# Altium PCB PCB1.PcbDoc
Units mm, origin at the board's own origin, x right, y up, seen from the top; angles counter-clockwise.
Board outline 107.7 x 33.66 mm, 2 copper layers (Top Layer, Bottom Layer); 44 components, 34 nets, 109 pads, 8 vias.
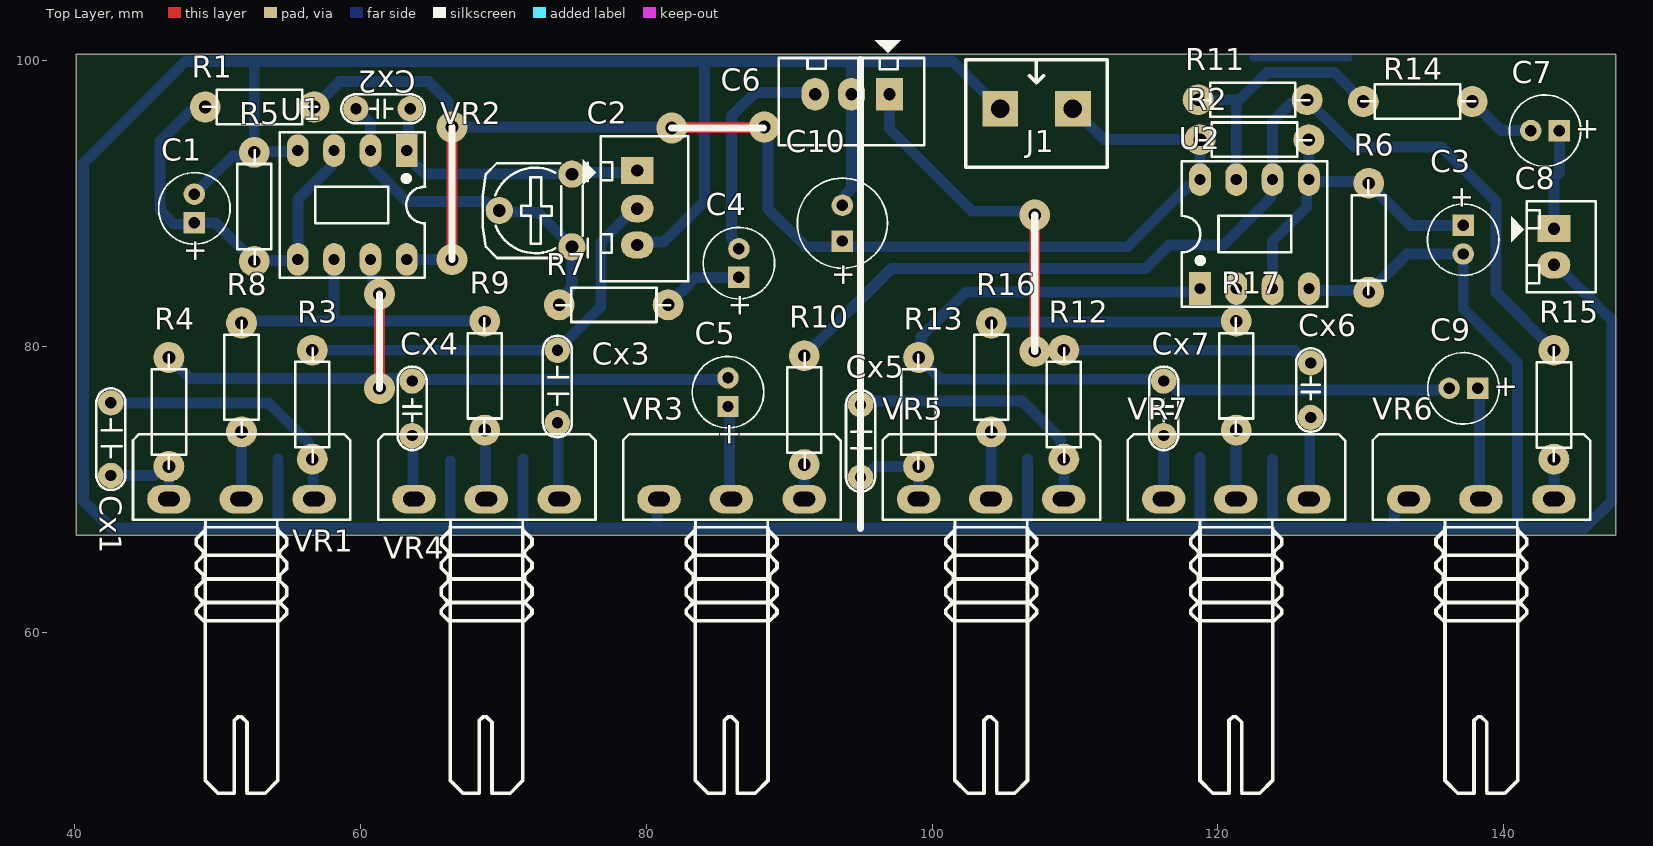
[diagram p0: Top Layer view]
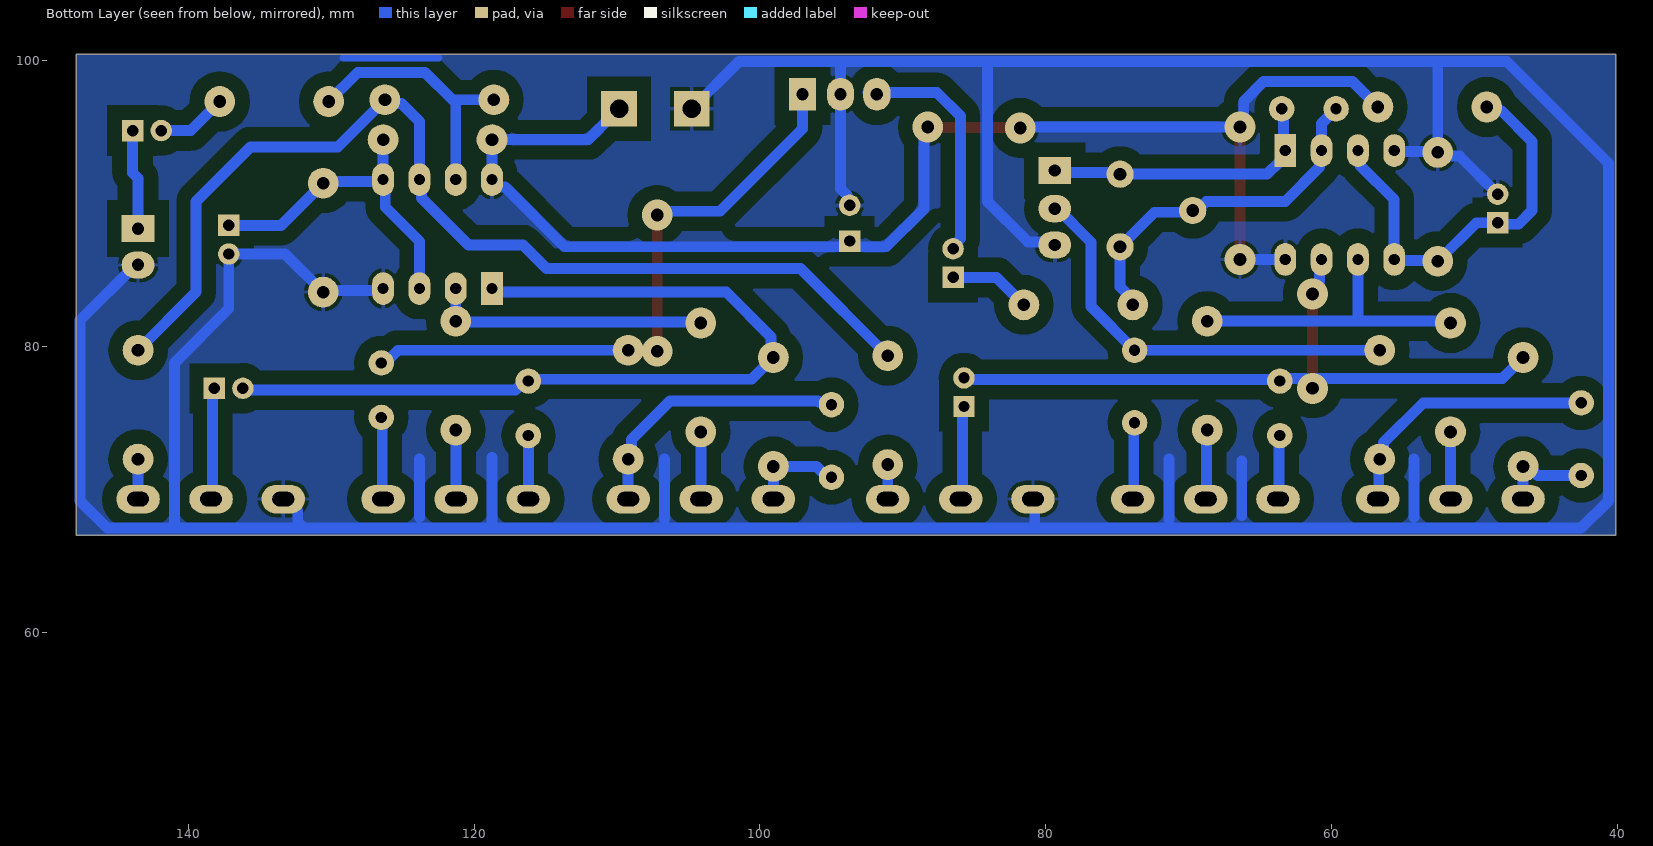
[diagram p1: Bottom Layer view, seen from below]
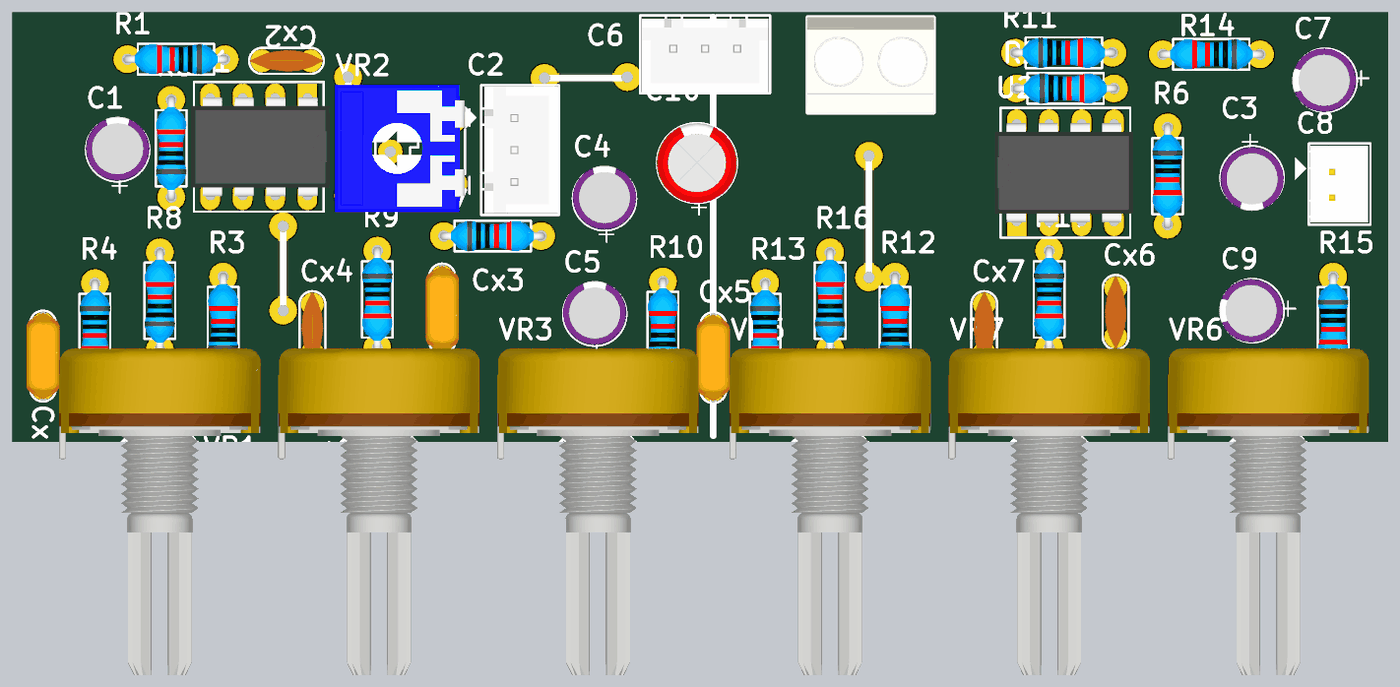
[diagram p2: 3D render of the assembled board from above, using the file's embedded part models]

## Layer stack, top to bottom
Top Solder: solder mask 0.0102, Solder Resist, Dk 3.5
Top Layer: signal copper 0.0356
Dielectric 1: dielectric 0.32, FR-4, Dk 4.8
Bottom Layer: signal copper 0.0356
Bottom Solder: solder mask 0.0102, Solder Resist, Dk 3.5

## Board outline
40.132,66.802 40.132,100.457 147.828,100.457 147.828,66.802

## Design rules (kind name [scope] priority, off if disabled: settings)
Clearance [All] p1: gap=0.254 ignorepadtopadclearanceinfootprint=FALSE except(0: Arc-Hole Track-Hole SMDPad-Hole THPad-Hole Via-Hole Fill-Hole Poly-Hole Region-Hole Text-Hole; 1.016: Arc-Fill Arc-Poly Arc-Region Track-Fill Track-Poly Track-Region SMDPad-Fill SMDPad-Poly SMDPad-Region THPad-Fill THPad-Poly THPad-Region Via-Fill Via-Poly Via-Region Fill-Fill Fill-Poly Fill-Region Poly-Poly Poly-Region Region-Region)
PolygonConnect [All] p1: connectstyle=Relief reliefconductorwidth=0.254 reliefentries=4 polygonreliefangle="90 Angle" airgapwidth=0.254
RoutingVias [All] p1: holewidth=0.711 width=1.27 viastyle="Through Hole" minholewidth=0.711 minwidth=1.27 maxholewidth=0.711 maxwidth=1.27
SolderMaskExpansion [All] p1: expansion=0.102 istentingtop=FALSE
Width [All] p1: maxlimit=1.016 minlimit=0.508 preferedwidth=0.762
30 further rules are at their usual default settings.

## Components (designator, comment, footprint, x,y, rotation, side; value= is the part's Value field where it differs from the comment)
C1 "CN-ALU-DIP" CA-ALU-5 48.387,89.678 r90 top value=104
C2 "EFX" Header3 79.375,92.202 r270 top
C3 "CN-ALU-DIP" CA-ALU-5 137.164,87.487 r270 top value=104
C4 "CN-ALU-DIP" CA-ALU-5 86.487,85.852 r90 top value=104
C5 "CN-ALU-DIP" CA-ALU-5 85.725,76.819 r90 top value=104
C6 "INPUT" Header3 96.901,97.663 r180 top
C7 "CN-ALU-DIP" CA-ALU-5 142.891,95.123 r180 top value=104
C8 "OUTPUT" Header2 143.51,88.265 r270 top
C9 "CN-ALU-DIP" CA-ALU-5 137.176,77.089 r180 top value=104
C10 "CN-ALU-DIP" CA-ALU-6.3R 93.726,88.646 r90 top value=104
Cx1 "XXpF" CN2-O 42.672,73.533 r270 top value=33pF
Cx2 "XXpF" CN1.5 61.468,96.647 r0 top value=33pF
Cx3 "XXpF" CN2-O 73.914,77.216 r270 top value=33pF
Cx4 "XXpF" CN1.5 63.627,75.565 r90 top value=33pF
Cx5 "XXpF" CN2-O 95.123,73.406 r270 top value=33pF
Cx6 "XXpF" CN1.5 126.492,77.089 r270 top value=33pF
Cx7 "XXpF" CN1.5 116.205,75.565 r90 top value=33pF
J1 "KF2" KF2-5.08 107.315,96.647 r0 top
R1 "Res" RES-1/4W-SMALL 53.213,96.774 r180 top
R2 "Res" RES-1/4W-SMALL 122.301,94.488 r0 top
R3 "Res" RES-1/4W-SMALL 56.642,75.692 r90 top
R4 "Res" RES-1/4W-SMALL 46.609,75.692 r270 top
R5 "Res" RES-1/4W-SMALL 52.578,89.535 r90 top
R6 "Res" RES-1/4W-SMALL 130.556,87.884 r270 top
R7 "Res" RES-1/4W-SMALL 77.47,82.931 r0 top
R8 "Res" RES-1/4W-SMALL 51.689,77.597 r90 top
R9 "Res" RES-1/4W-SMALL 68.707,78.232 r270 top
R10 "Res" RES-1/4W-SMALL 91.059,75.311 r90 top
R11 "Res" RES-1/4W-SMALL 122.174,97.282 r0 top
R12 "Res" RES-1/4W-SMALL 109.22,75.692 r90 top
R13 "Res" RES-1/4W-SMALL 99.06,75.692 r270 top
R14 "Res" RES-1/4W-SMALL 134.239,97.155 r180 top
R15 "Res" RES-1/4W-SMALL 143.51,76.2 r270 top
R16 "Res" RES-1/4W-SMALL 104.14,77.597 r90 top
R17 "Res" RES-1/4W-SMALL 121.285,78.232 r270 top
U1 "*4558" DIP8 59.563,89.916 r180 top
U2 "*4558" DIP8 122.428,87.884 r0 top
VR1 "50K" VR-S1 51.689,69.342 r0 top value="Volume 50k"
VR2 "50K" VR-S2 74.803,86.995 r90 top value="Volume 50k"
VR3 "50K" VR-S1 85.979,69.342 r0 top value="Volume 50k"
VR4 "50K" VR-S1 68.834,69.342 r0 top value="Volume 50k"
VR5 "50K" VR-S1 104.14,69.342 r0 top value="Volume 50k"
VR6 "50K" VR-S1 138.43,69.342 r0 top value="Volume 50k"
VR7 "50K" VR-S1 121.285,69.342 r0 top value="Volume 50k"

## Footprints (in the part's own frame and the unit in brackets; to place one, negate y for a bottom-side part, rotate by r counter-clockwise, add the part's x,y. Pads: shape width x height; smd on the part's side, far side on the other; paste and mask are expansions set on the pad)
CA-ALU-5 [mm] "Polarized capacitors, Aluminum Electrolytic Capacitors, 2-Leads, Body 5x11x2x0.5"
  rect 1.5x1.5 hole 0.8: 1(-1,0)
  round 1.5 hole 0.8: 2(1,0)
  silkscreen extent -2.5,-2.5 2.5,2.5, body extent -2.41,-2.5 2.59,2.5, height 11
CA-ALU-6.3R [mm] "Polarized capacitors, Aluminum Electrolytic Capacitors, 2-Leads, Body 6.3x15x2.5x0.5"
  rect 1.5x1.5 hole 0.8: 1(-1.25,0)
  round 1.5 hole 0.8: 2(1.25,0)
  silkscreen extent -3.15,-3.15 3.15,3.15, body extent -3.12,-3.13 3.14,3.15, height 15.26
CN1.5 [mil]
  round 70 hole 31: 1(-70,0) 2(80,0)
  silkscreen extent -110,-40 120,40, body extent -110,-33 120,33, height 235
CN2-O [mil]
  round 70 hole 31: 1(-100,-5) 2(100,-5)
  silkscreen extent -140,-45 140,35, body extent -139,-56 139,46, height 360
DIP8 [mil] "DIP, 8-Leads, Row Spacing 7.62mm, Pitch 2.54mm, Body 9.91x6.73mm"
  rect 60x90 hole 31: 1(-145,-150)
  oval 60x90 hole 31: 2(-45,-150) 3(55,-150) 4(155,-150) 5(155,150) 6(55,150) 7(-45,150) 8(-145,150)
  silkscreen extent -195,-200 205,200, body extent -213,-153 213,153, height 177
Header2 [mil] "CON2"
  rect 75x90 hole 34: 1(0,0)
  oval 75x90 hole 34: 2(100,0)
  silkscreen extent -75,-118 175,115, body extent -68,-70 168,107, height 236
Header3 [mil] "CON 3"
  rect 75x90 hole 34: 1(-5,0)
  oval 75x90 hole 34: 2(100,0) 3(200,0)
  silkscreen extent -100,-150 300,140, body extent -95,-90 295,136, height 276
KF2-5.08 [mm]
  rect 2.5x2.5 hole 1.3: 1(-2.54,0) 2(2.54,0)
  silkscreen extent -4.95,-4.08 4.95,3.43, body extent -5,-4.07 5,3.43, height 10
RES-1/4W-SMALL [mil]
  round 85 hole 35: 1(-140,0) 2(160,0)
  silkscreen extent -148,-47 166,47, body extent -152,-47 172,47, height 97
VR-S1 [mil]
  oval 120x78.74 hole 40 slot 60 at 0 deg: 1(-200,0) 2(-1,0) 3(200,0)
  silkscreen extent -299,-810 300,179, body extent -310,-818 310,188, height 839
VR-S2 [mil] "Resistor Variable"
  round 75 hole 35: 1(0,0) 2(100,200) 3(200,0)
  silkscreen extent -31,-44 231,246, body extent -87,-30 307,372, height 165

## Part data
C1 C3 C4 C5 C7 C9 C10: "Capacitor (Semiconductor SIM Model)", LatestRevisionDate=17-Jul-2002, LatestRevisionNote="Re-released for DXP Platform.", PackageReference=C1206, Publisher="Altium Limited"
C2 C6: library part Header3, "Header IDC, 3 x 1 Pin Vertical 2.54mm Pitch (Non-Boxed, Male)", Manufacturer="W¨¹rth Elektronik eiSos GmbH", partNo=613002143121, ComponentLink1 Description=Manufacturer, ComponentLink1URL=http://www.we-online.com, ComponentLink2 Description=Datasheet, ComponentLink2URL=http://katalog.we-online.de/em/datasheet/6130xx143121.pdf, Created by="Karrer Zheng", Created Date="29 March 2013", NoPins=02
C8: library part Header2, "Header IDC, 2 x 1 Pin Vertical 2.54mm Pitch (Non-Boxed, Male)", Manufacturer="W¨¹rth Elektronik eiSos GmbH", partNo=613002143121, ComponentLink1 Description=Manufacturer, ComponentLink1URL=http://www.we-online.com, ComponentLink2 Description=Datasheet, ComponentLink2URL=http://katalog.we-online.de/em/datasheet/6130xx143121.pdf, Created by="Karrer Zheng", Created Date="29 March 2013", NoPins=02
Cx1 Cx2 Cx3 Cx4 Cx5 Cx6 Cx7: library part CN
J1: Manufacturer="Würth Elektronik eiSos GmbH", partNo=691103110002, ComponentLink1 Description=Manufacturer, ComponentLink1URL=http://www.we-online.com, ComponentLink2 Description=Datasheet, ComponentLink2URL=http://katalog.we-online.de/em/datasheet/6911031100xx.pdf, Created by="Karrer Zheng", Created Date="29 October 2013", NoPins=2
R1 R2 R3 R4 R5 R6 R7 R8 R9 R10 R11 R12 R13 R14 R15 R16 R17: Manufacturer="Generic Components", Class=Passive, Published=08/06/2000, Publisher="Altium Hobart Technology Centre", SubClass=R
U1 U2: library part 4558
VR1 VR2 VR3 VR4 VR5 VR6 VR7: library part VR-S, "Var Resistor"

## Via types
v1: diameter 2.159, hole 0.889, Top Layer to Bottom Layer, 8 vias

## Nets (pads, with @x,y where several pads share a name; then routed paths per layer and width w, separated by ;. In a path a pad name is that pad's centre, name@x,y a point inside that pad or via, vN(x,y) a via of type N, cw(c..) or ccw(c..) an arc to the next point about the centre after c; other vN are vias at no path point)
+12: C10.1 J1.2 R1.1 R2.1 U1.8 U2.8 | length 98.5
  Top Layer w0.762: v1(66.421,86.106) v1(66.421,95.377) ; v1(81.788,95.308) 81.822,95.343 88.231,95.343 v1(88.265,95.377)
  Bottom Layer w0.762: R1.1 58.547,98.552 64.77,98.552 66.154,97.168 66.154,95.644 v1(66.421,95.377) v1@81.788,95.377 ; U1.8 v1(66.421,86.106) ; v1(88.265,95.377) 88.532,95.11 88.532,89.649 91.186,86.995 94.361,86.995 113.665,86.995 117.837,91.167 118.393,91.167 U2.8@118.745,91.519 ; J1.2 112.014,94.488 R2.1 U2.8
GND: C1.2 C2.3 C3.2 C6.2 C8.2 C10.2 J1.1 R5.2 R6.2 U1.4 U2.4 VR3.1 VR6.1 | length 322.1
  Bottom Layer w0.762: C1.2 51.041,93.332 52.311,93.332 R5.2 ; 54.229,68.072 54.229,72.136 ; U1.4 55.562,93.662 52.642,93.662 R5.2 ; 66.294,68.199 66.294,72.009 ; 71.374,67.945 71.374,72.136 ; C2.3 79.594,87.341 81.245,87.341 84.074,90.17 84.074,99.949 ; VR3.1 80.772,69.215 80.772,67.31 ; C10.2@93.867,89.868 93.867,90.559 94.361,91.053 94.361,99.949 ; J1.1 101.473,99.949 94.361,99.949 ; 106.68,67.945 106.68,72.136 ; 118.745,67.818 118.745,72.263 ; 123.825,68.072 123.825,72.136 ; U2.4 126.492,83.947 130.429,83.947 R6.2 133.223,86.487 C3.2 137.164,82.673 140.97,78.867 140.97,67.31 ; VR6.1 133.161,69.342 132.335,68.516 132.335,67.756 131.888,67.31 ; C8.2 143.701,85.725 147.574,81.852 147.574,69.215 145.669,67.31 140.97,67.31 ; R5.2 52.578,99.949 ; 52.578,99.949 84.074,99.949 ; 52.578,99.949 47.752,99.949 40.64,92.837 40.64,69.215 42.545,67.31 80.772,67.31 ; 80.772,67.31 131.888,67.31 ; 84.074,99.949 94.361,99.949 ; 131.888,67.31 140.97,67.31
NetC2_1: C2.1 Cx2.2 U1.1 VR2.3 | length 20
  Bottom Layer w0.762: Cx2.2 63.373,96.52 63.373,93.853 U1.1 63.246,93.345 63.627,92.964 64.516,92.075 ; 64.643,92.075 VR2.3 74.93,92.202 79.248,92.202 C2.1
NetC2_2: C2.2 Cx3.1 R3.2 | length 29.1
  Bottom Layer w0.762: R3.2 Cx3.1@73.406,79.756 ; Cx3.1 76.835,82.804 76.835,87.312 79.184,89.662 C2.2
NetC4_1: C4.1 R7.2 | length 5.7
  Bottom Layer w0.762: R7.2 83.455,84.852 C4.1
NetC4_2: C4.2 C6.3 | length 16.7
  Bottom Layer w0.762: C4.2 86.487,87.052 85.979,87.56 85.979,96.139 87.63,97.79 C6.3@92.456,97.79
NetC5_1: C5.1 VR3.2 | length 6.6
  Bottom Layer w0.762: C5.1 85.839,75.705 85.839,69.456 VR3.2
NetC5_2: C5.2 Cx4.2 R4.1 U1.7 | length 49.1
  Top Layer w0.762: v1(61.341,77.089) v1(61.341,83.693)
  Bottom Layer w0.762: R4.1 48.07,77.787 v1@61.341,77.787 ; U1.7 60.852,85.96 60.852,84.56 61.341,84.071 v1(61.341,83.693) ; v1@61.849,77.787 63.436,77.787 Cx4.2@63.5,77.724 ; Cx4.2 63.738,77.708 85.868,77.708 C5.2@85.979,77.819 ; C5.2@86.006,77.719 85.906,77.819 C5.2@86.106,77.819
NetC6_1: C6.1 Cx6.1 R12.2 | length 42.2
  Top Layer w0.762: v1(107.188,79.687) v1@107.188,89.154
  Bottom Layer w0.762: C6.1 97.028,95.25 102.798,89.48 106.921,89.48 v1(107.188,89.212) ; R12.2 125.328,79.756 126.217,78.867 Cx6.1
NetC7_1: C7.1 C8.1 | length 7
  Bottom Layer w0.762: C8.1 143.51,91.789 143.891,92.17 C7.1
NetC7_2: C7.2 R14.1 | length 4.9
  Bottom Layer w0.762: R14.1 139.827,95.123 C7.2
NetC9_1: C9.1 VR6.2 | length 7.8
  Bottom Layer w0.762: C9.1 138.29,76.975 138.29,69.456 VR6.2
NetC9_2: C9.2 Cx7.2 R13.1 U2.1 | length 60.3
  Bottom Layer w0.762: Cx7.2 116.078,77.724 100.587,77.724 99.063,79.248 R13.1 99.235,79.423 99.235,80.693 102.362,83.82 118.491,83.82 U2.1 ; Cx7.2@116.48,77.597 117.115,76.962 136.049,76.962 C9.2
NetCx1_1: Cx1.1 R3.1 VR1.3 | length 19.5
  Bottom Layer w0.762: Cx1.1@42.164,75.946 42.291,76.073 53.594,76.073 56.375,73.292 56.375,72.403 56.706,72.072 56.706,69.406 VR1.3
NetCx1_2: Cx1.2 R4.2 VR1.1 | length 6.6
  Bottom Layer w0.762: Cx1.2 45.596,70.993 46.231,71.628 R4.2 VR1.1
NetCx2_1: Cx2.1 R7.1 U1.2 VR2.1 VR2.2 | length 24.7
  Bottom Layer w0.762: Cx2.1 60.706,95.631 U1.2 ; U1.2@60.852,93.58 60.852,92.564 63.246,90.17 68.779,90.17 VR2.2@69.414,89.535 ; VR2.2 69.85,89.408 72.39,89.408 VR2.1 74.803,84.198 73.914,83.309 R7.1
NetCx3_2: Cx3.2 VR4.3 | length 5.4
  Bottom Layer w0.762: Cx3.2 73.85,74.612 73.85,69.406 VR4.3
NetCx4_1: Cx4.1 VR4.1 | length 4.5
  Bottom Layer w0.762: Cx4.1 63.691,73.724 63.691,69.406 VR4.1
NetCx5_1: Cx5.1 R12.1 VR5.3 | length 19.5
  Bottom Layer w0.762: Cx5.1 95.19,76.14 95.891,76.14 95.95,76.2 106.299,76.2 108.982,73.517 108.982,72.374 R12.1 VR5.3
NetCx5_2: Cx5.2 R13.2 VR5.1 | length 6.7
  Bottom Layer w0.762: Cx5.2 95.271,70.866 96.033,71.628 R13.2 VR5.1
NetCx6_2: Cx6.2 VR7.3 | length 5.8
  Bottom Layer w0.762: VR7.3 126.428,69.406 126.428,74.993 Cx6.2
NetCx7_1: Cx7.1 VR7.1 | length 4.4
  Bottom Layer w0.762: VR7.1 Cx7.1
NetR8_1: R8.1 VR1.2 | length 4.7
  Bottom Layer w0.762: VR1.2 51.676,69.355 51.676,74.028 R8.1
NetR8_2: R8.2 R9.1 U1.6 | length 20.9
  Bottom Layer w0.762: R8.2@51.435,81.788 58.039,81.788 ; U1.6 58.166,81.915 58.039,81.788 ; R9.1@67.945,81.788 58.039,81.788
NetR9_2: R9.2 VR4.2 | length 4.9
  Bottom Layer w0.762: R9.2 68.758,74.117 68.758,69.393 VR4.2
NetR10_1: R10.1 VR3.3 | length 2.4
  Bottom Layer w0.762: VR3.3 R10.1
NetR10_2: R10.2 R11.2 R15.1 U2.6 | length 73.9
  Bottom Layer w0.762: R10.2 97.155,85.471 114.935,85.471 116.586,87.122 120.396,87.122 123.679,90.405 123.679,91.548 U2.6 123.825,95.758 125.082,97.015 125.971,97.015 R11.2 129.54,93.98 135.636,93.98 139.446,90.17 139.446,83.82 R15.1
NetR11_1: R11.1 R14.2 U2.7 | length 18.8
  Bottom Layer w0.762: R11.1 121.523,97.282 123.428,99.187 128.143,99.187 R14.2 ; U2.7 121.285,97.282
NetR15_2: R15.2 VR6.3 | length 2.8
  Bottom Layer w0.762: VR6.3 R15.2
NetR16_1: R16.1 VR5.2 | length 4.7
  Bottom Layer w0.762: VR5.2 104.127,69.355 104.127,74.028 R16.1
NetR16_2: R16.2 R17.1 U2.2 | length 19.5
  Bottom Layer w0.762: R16.2 104.203,81.724 121.221,81.724 R17.1 U2.2
NetR17_2: R17.2 VR7.2 | length 4.8
  Bottom Layer w0.762: VR7.2 121.272,69.355 121.272,74.155 R17.2
V1/2-1: C1.1 R1.2 R5.1 U1.3 U1.5 | length 28.9
  Bottom Layer w0.762: R1.2 48.882,96.507 48.12,96.507 45.974,94.361 45.974,89.535 46.94,88.569 48.278,88.569 C1.1 49.879,88.678 R5.1 52.642,86.042 55.562,86.042 U1.5 55.626,90.297 58.02,92.691 58.02,93.58 U1.3
V1/2-2: C3.1 R2.2 R6.1 U2.3 U2.5 | length 23.6
  Bottom Layer w0.762: U2.3 123.825,87.376 126.219,89.77 126.219,91.548 U2.5 ; R2.2 U2.5 ; C3.1 133.509,88.487 130.429,91.567 126.492,91.567 U2.5
copper on no net: | length 6.7
  Bottom Layer w0.508: 122.451,100.203 129.158,100.203

## Polygon pours and split planes (outlines as drawn)
+12 on Bottom Layer "+12_L02_P002" (solid, remove dead copper, pour order 2): 40.132,100.457 40.132,66.802 147.828,66.802 147.828,100.711
GND on Bottom Layer "GND_L02_P001" (solid, remove dead copper, pour order 1): 40.132,100.457 40.132,66.802 147.828,66.802 147.828,100.457

## Silkscreen, mask and mechanical layers (free items; w line width, h text height)
Top Overlay:
  lines w0.508: 61.341,77.089 61.341,83.693 ; 66.421,86.106 66.421,95.377 ; 81.788,95.308 88.196,95.308 ; 94.996,67.31 94.996,100.076 ; 107.188,79.687 107.188,89.212

## Text inside footprints (layer, text, board x,y; h text height)
C1: Top Overlay "+" at 49.124,85.853 h1.5 r90
C3: Top Overlay "+" at 136.427,91.312 h1.5 r270
C4: Top Overlay "+" at 87.224,82.027 h1.5 r90
C5: Top Overlay "+" at 86.462,72.994 h1.5 r90
C7: Top Overlay "+" at 146.716,95.86 h1.5 r180
C9: Top Overlay "+" at 141.001,77.826 h1.5 r180
C10: Top Overlay "+" at 94.463,84.171 h1.5 r90